# Altium PCB bldc.PcbDoc
Units mil, origin at the board's own origin, x right, y up, seen from the top; angles counter-clockwise.
Board outline 6000 x 4000 mil, 2 copper layers (Top Layer, Bottom Layer); 170 components, 106 nets, 483 pads, 0 vias.
Unrouted connection lines stored in the file: 348.
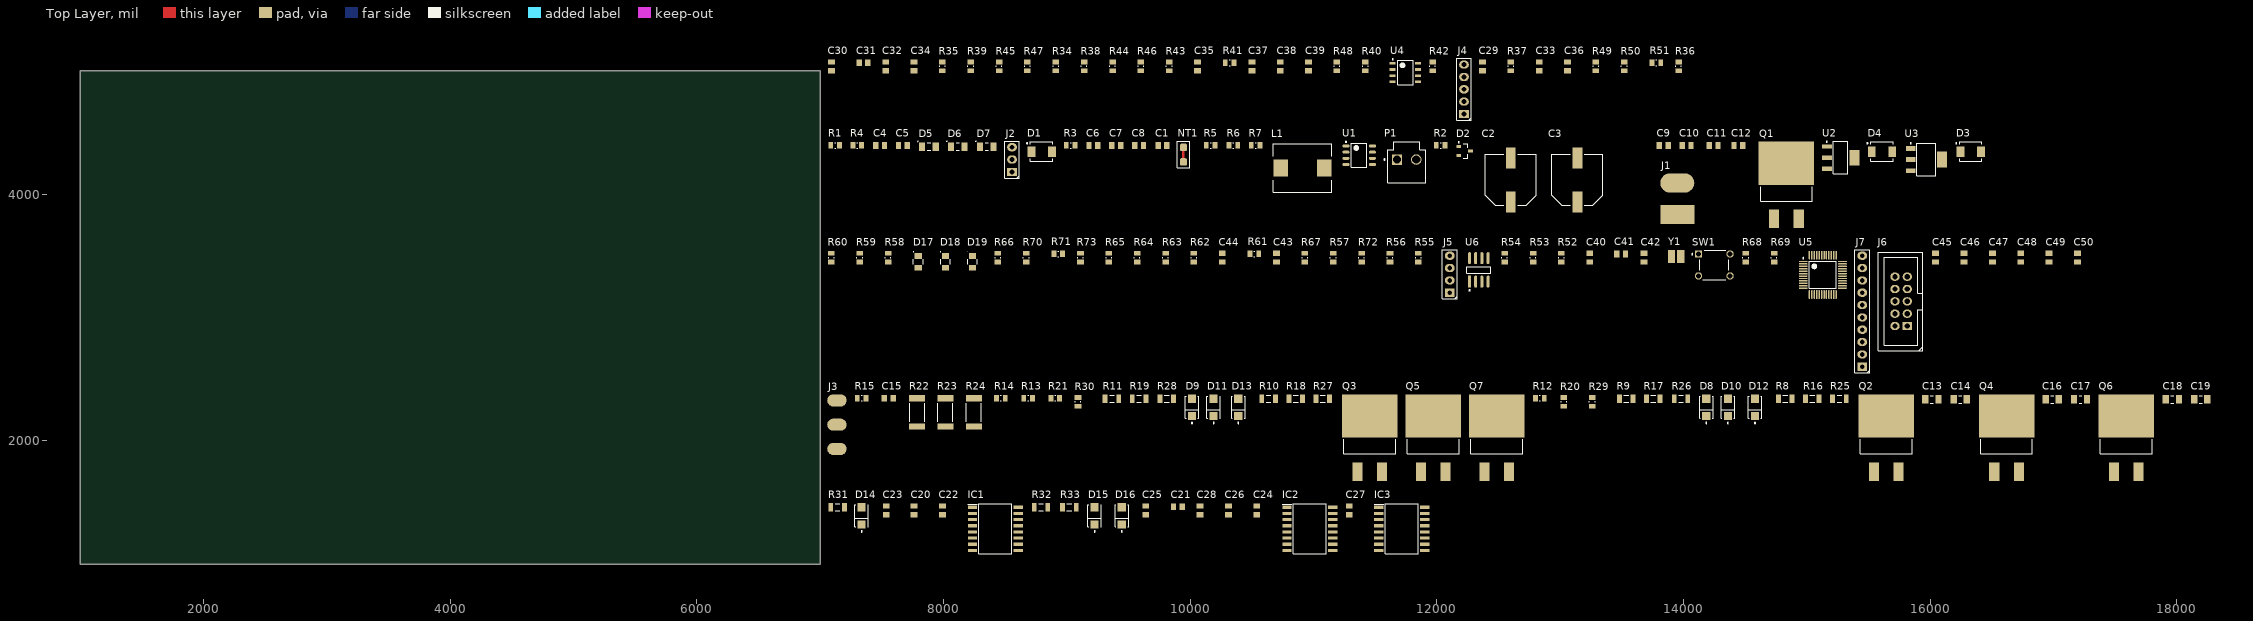
[diagram p0: Top Layer view]
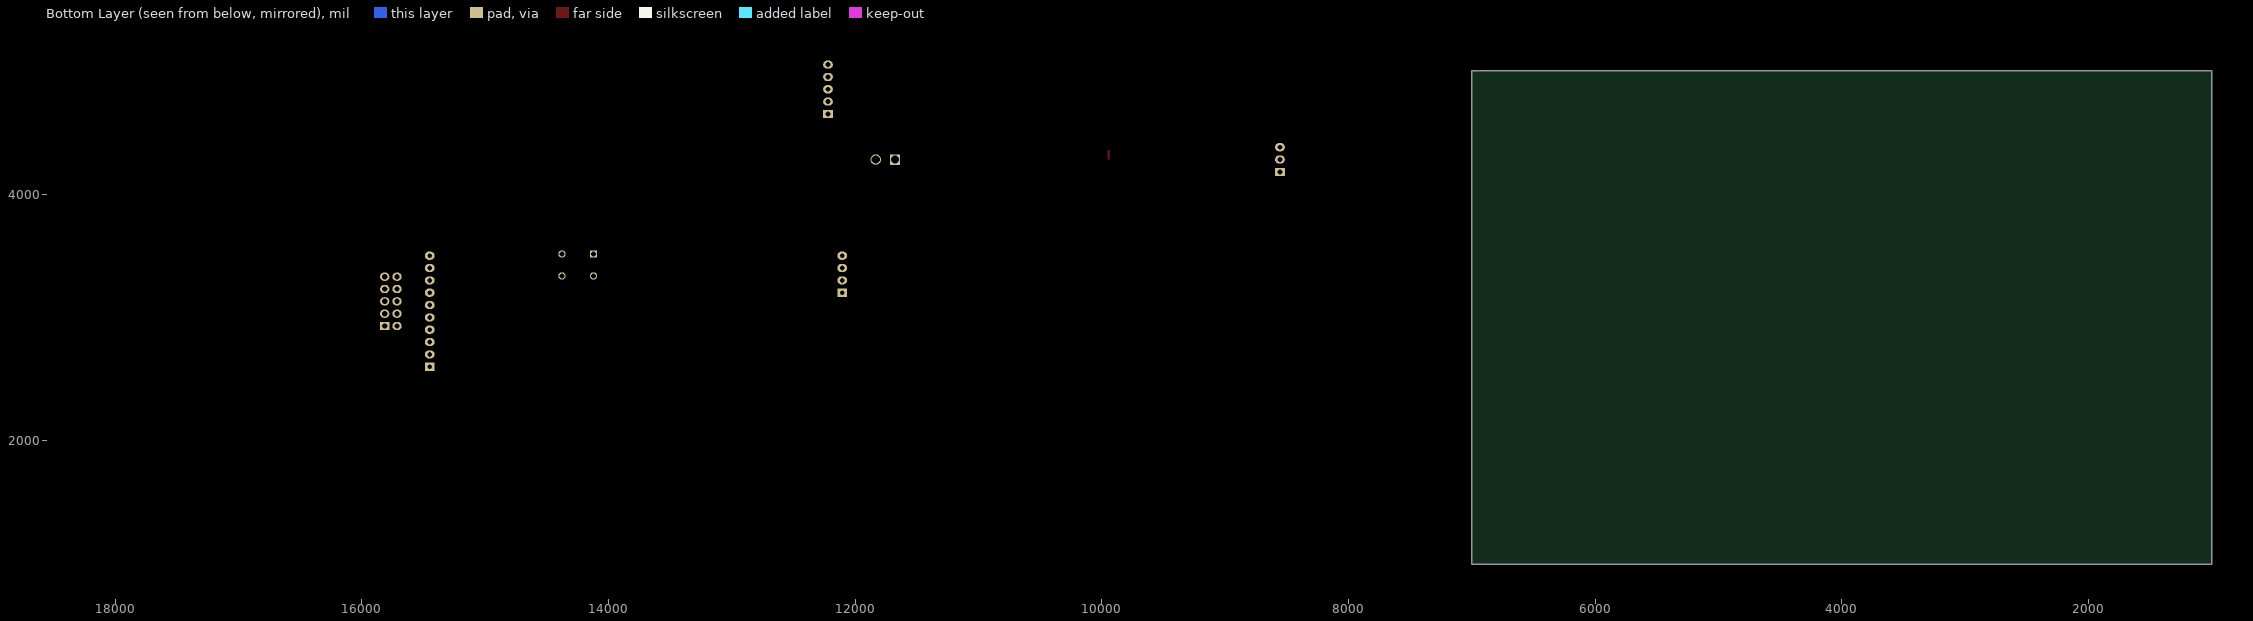
[diagram p1: Bottom Layer view, seen from below]

## Layer stack, top to bottom
Top Solder: solder mask 0.4, Solder Resist, Dk 3.5
Top Layer: signal copper 1.4
Dielectric 1: dielectric 12.6, FR-4, Dk 4.8
Bottom Layer: signal copper 1.4
Bottom Solder: solder mask 0.4, Solder Resist, Dk 3.5

## Board outline
1000,1000 7000,1000 7000,5000 1000,5000

## Design rules (kind name [scope] priority, off if disabled: settings)
Clearance [All] p1: gap=10 ignorepadtopadclearanceinfootprint=FALSE except(0: Arc-Hole Track-Hole SMDPad-Hole THPad-Hole Via-Hole Fill-Hole Poly-Hole Region-Hole Text-Hole)
PolygonConnect [All] p1: connectstyle=Relief reliefconductorwidth=10 reliefentries=4 polygonreliefangle="90 Angle" airgapwidth=10
RoutingVias [All] p1: holewidth=28 width=50 viastyle="Through Hole" minholewidth=28 minwidth=50 maxholewidth=28 maxwidth=50
SolderMaskExpansion [All] p1: expansion=4 istentingtop=FALSE
Width [All] p1: maxlimit=10 minlimit=10 preferedwidth=10
30 further rules are at their usual default settings.

## Components (designator, comment, footprint, x,y, rotation, side; value= is the part's Value field where it differs from the comment)
C1 "CAP" CAPC2012X06N 9775,4395 r0 top value=2.2u
C2 "Cap_Pos" B40940 12600,4115 r90 top value=120u
C3 "Cap_Pos" B40940 13140,4115 r90 top value=120u
C4 "CAP" CAPC2012X06N 7485,4395 r0 top value=22n
C5 "CAP" CAPC2012X06N 7670,4395 r0 top value=22p
C6 "CAP" CAPC2012X06N 9215,4395 r0 top value=4.7u
C7 "CAP" CAPC2012X06N 9400,4395 r0 top value=4.7u
C8 "CAP" CAPC2012X06N 9585,4395 r0 top value=4.7u
C9 "CAP" CAPC2012X06N 13840,4395 r0 top value=0.1u
C10 "CAP" CAPC2012X06N 14025,4395 r0 top value=10u
C11 "CAP" CAPC2012X06N 14245,4395 r0 top value=0.1u
C12 "CAP" CAPC2012X06N 14445,4395 r0 top value=10u
C13 "CAP" CAP_1206 16015,2335 r0 top value=0.1u
C14 "CAP" CAP_1206 16245,2335 r0 top value=1u
C15 "CAP" CAPC2012X06N 7555,2345 r0 top value=47n
C16 "CAP" CAP_1206 16990,2335 r0 top value=0.1u
C17 "CAP" CAP_1206 17220,2335 r0 top value=1u
C18 "CAP" CAP_1206 17965,2335 r0 top value=0.1u
C19 "CAP" CAP_1206 18195,2335 r0 top value=1u
C20 "CAP" CAPC2012X06N 7760,1435 r90 top value=0.1u
C21 "CAP" CAPC2012X06N 9900,1465 r0 top value=0.1u
C22 "CAP" CAPC2012X06N 7990,1435 r90 top value=1u
C23 "CAP" CAPC2012X06N 7535,1435 r90 top value=1u
C24 "CAP" CAPC2012X06N 10540,1435 r90 top value=1u
C25 "CAP" CAPC2012X06N 9640,1435 r90 top value=1u
C26 "CAP" CAPC2012X06N 10310,1435 r90 top value=0.1u
C27 "CAP" CAPC2012X06N 11290,1435 r90 top value=1u
C28 "CAP" CAPC2012X06N 10080,1435 r90 top value=1u
C29 "CAP" CAPC2012X06N 12370,5035 r90 top value=0.1n
C30 "CAP" CAPC2012X06N 7090,5035 r90 top value=150n
C31 "CAP" CAPC2012X06N 7350,5065 r0 top value=150n
C32 "CAP" CAPC2012X06N 7530,5035 r90 top value=150n
C33 "CAP" CAPC2012X06N 12830,5035 r90 top value=1u
C34 "CAP" CAPC2012X06N 7760,5035 r90 top value=150n
C35 "CAP" CAPC2012X06N 10060,5035 r90 top value=47n
C36 "CAP" CAPC2012X06N 13060,5035 r90 top value=0.1u
C37 "CAP" CAPC2012X06N 10500,5035 r90 top value=33n
C38 "CAP" CAPC2012X06N 10730,5035 r90 top value=33n
C39 "CAP" CAPC2012X06N 10960,5035 r90 top value=33n
C40 "CAP" CAPC2012X06N 13240,3485 r90 top value=6p
C41 "CAP" CAPC2012X06N 13495,3515 r0 top value=6p
C42 "CAP" CAPC2012X06N 13680,3485 r90 top value=0.1u
C43 "CAP" CAPC2012X06N 10700,3485 r90 top value=1u
C44 "CAP" CAPC2012X06N 10260,3485 r90 top value=0.1u
C45 "CAP" CAPC2012X06N 16045,3485 r90 top value=4.7u
C46 "CAP" CAPC2012X06N 16275,3485 r90 top value=0.1u
C47 "CAP" CAPC2012X06N 16505,3485 r90 top value=0.1u
C48 "CAP" CAPC2012X06N 16735,3485 r90 top value=0.1u
C49 "CAP" CAPC2012X06N 16965,3485 r90 top value=0.1u
C50 "CAP" CAPC2012X06N 17195,3485 r90 top value=0.1u
D1 "STPS2L40U" CAPM3216X18N 8795,4345 r0 top
D2 "BZX84-C12" SOT23 12225,4350 r0 top
D3 "STPS2L40U" CAPM3216X18N 16330,4345 r0 top
D4 "STPS2L40U" CAPM3216X18N 15610,4345 r0 top
D5 "GREEN" DIOC3216X06N 7880,4385 r0 top
D6 "GREEN" DIOC3216X06N 8115,4385 r0 top
D7 "GREEN" DIOC3216X06N 8350,4385 r0 top
D8 "ES1D-E3/61T" FP-95400-MFG 14185,2270 r90 top value="10 pF"
D9 "ES1D-E3/61T" FP-95400-MFG 10015,2270 r90 top value="10 pF"
D10 "ES1D-E3/61T" FP-95400-MFG 14360,2270 r90 top value="10 pF"
D11 "ES1D-E3/61T" FP-95400-MFG 10190,2270 r90 top value="10 pF"
D12 "ES1D-E3/61T" FP-95400-MFG 14580,2270 r90 top value="10 pF"
D13 "ES1D-E3/61T" FP-95400-MFG 10390,2270 r90 top value="10 pF"
D14 "ES1D-E3/61T" FP-95400-MFG 7335,1390 r90 top value="10 pF"
D15 "ES1D-E3/61T" FP-95400-MFG 9225,1390 r90 top value="10 pF"
D16 "ES1D-E3/61T" FP-95400-MFG 9445,1390 r90 top value="10 pF"
D17 "LED_GREEN" LED_3216 7795,3450 r90 top
D18 "LED_GREEN" LED_3216 8015,3450 r90 top
D19 "LED_GREEN" LED_3216 8235,3450 r90 top
IC1 "IR2110STRPBF" SOIC127P1032X265-16N 8420,1285 r0 top
IC2 "IR2110STRPBF" SOIC127P1032X265-16N 10970,1285 r0 top
IC3 "IR2110STRPBF" SOIC127P1032X265-16N 11715,1285 r0 top
J1 "Power" "Power Connector" 13950,3834.09 r90 top
J2 "Jp3" "HEADER 1x3 2.54mm" 8555,4280 r90 top
J3 "Power 3" "Power 3" 7135,2130 r90 top
J4 "Header 1x5 2.54mm" "Header 1x5 2.54mm" 12220,4650 r90 top
J5 "Header 1x4 2.54mm" "Header 1x4 2.54mm" 12105,3200 r90 top
J6 "IDC-10MS" IDC-10MS 15765,3130 r90 top
J7 "Header 2x4 2.54mm" "Header 1x10 2.54mm" 15450,2600 r90 top
L1 "HE1040" HE1040 10910,4210 r0 top value=100u
NT1 "NT" NT_20mil 9945,4320 r90 top net-tie
P1 "B2P-VH(LF)(SN)" JST-B2P-VH(LF)(SN)_V 11755,4225 r0 top
Q1 "IRF4905STRLPBF" FP-PG-TO263-3-MFG 14835,4075 r0 top
Q2 "IRF1010ZSTRLPBF" FP-PG-TO263-3-MFG 15645,2025 r0 top
Q3 "IRF1010ZSTRLPBF" FP-PG-TO263-3-MFG 11455,2025 r0 top
Q4 "IRF1010ZSTRLPBF" FP-PG-TO263-3-MFG 16620,2025 r0 top
Q5 "IRF1010ZSTRLPBF" FP-PG-TO263-3-MFG 11970,2025 r0 top
Q6 "IRF1010ZSTRLPBF" FP-PG-TO263-3-MFG 17590,2025 r0 top
Q7 "IRF1010ZSTRLPBF" FP-PG-TO263-3-MFG 12485,2025 r0 top
R1 "Resistor" RESC2012X06N 7120,4395 r0 top value=13k
R2 "Resistor" RESC2012X06N 12030,4395 r0 top value=3.5k
R3 "Resistor" RESC2012X06N 9030,4395 r0 top value=44.2k
R4 "Resistor" RESC2012X06N 7300,4395 r0 top value=5.11k
R5 "Resistor" RESC2012X06N 10165,4395 r0 top value=1k
R6 "Resistor" RESC2012X06N 10350,4395 r0 top value=330
R7 "Resistor" RESC2012X06N 10530,4395 r0 top value=330
R8 "1k" RESC3016X06N 14825,2340 r0 top value=20
R9 "1k" RESC3016X06N 13535,2340 r0 top value=0
R10 "1k" RESC3016X06N 10635,2340 r0 top value=20
R11 "1k" RESC3016X06N 9365,2340 r0 top value=0
R12 "10k" RESC2012X06N 12835,2345 r0 top
R13 "10k" RESC2012X06N 8685,2345 r0 top
R14 "Resistor" RESC2012X06N 8465,2345 r0 top value=1k
R15 "Resistor" RESC2012X06N 7335,2345 r0 top value=1k
R16 "1k" RESC3016X06N 15045,2340 r0 top value=20
R17 "1k" RESC3016X06N 13755,2340 r0 top value=0
R18 "1k" RESC3016X06N 10855,2340 r0 top value=20
R19 "1k" RESC3016X06N 9585,2340 r0 top value=0
R20 "10k" RESC2012X06N 13030,2315 r90 top
R21 "10k" RESC2012X06N 8905,2345 r0 top
R22 "Resistor" RESC2512 7785,2230 r90 top value=40m
R23 "Resistor" RESC2512 8015,2230 r90 top value=40m
R24 "Resistor" RESC2512 8245,2230 r90 top value=40m
R25 "1k" RESC3016X06N 15265,2340 r0 top value=20
R26 "1k" RESC3016X06N 13980,2340 r0 top value=0
R27 "1k" RESC3016X06N 11075,2340 r0 top value=20
R28 "1k" RESC3016X06N 9810,2340 r0 top value=0
R29 "10k" RESC2012X06N 13260,2315 r90 top
R30 "10k" RESC2012X06N 9090,2315 r90 top
R31 "Resistor" RESC3016X06N 7140,1460 r0 top value=0
R32 "Resistor" RESC3016X06N 8790,1460 r0 top value=0
R33 "Resistor" RESC3016X06N 9020,1460 r0 top value=0
R34 "Resistor" RESC2012X06N 8910,5035 r90 top value=12k
R35 "Resistor" RESC2012X06N 7990,5035 r90 top value=1.5k
R36 "Resistor" RESC2012X06N 13960,5035 r90 top value=47k
R37 "Resistor" RESC2012X06N 12600,5035 r90 top value=7.5k
R38 "Resistor" RESC2012X06N 9140,5035 r90 top value=12k
R39 "Resistor" RESC2012X06N 8220,5035 r90 top value=1.5k
R40 "Resistor" RESC2012X06N 11420,5035 r90 top value=9.1k
R41 "Resistor" RESC2012X06N 10320,5065 r0 top value=9.1k
R42 "Resistor" RESC2012X06N 11965,5035 r90 top value=68k
R43 "Resistor" RESC2012X06N 9830,5035 r90 top value=68k
R44 "Resistor" RESC2012X06N 9370,5035 r90 top value=12k
R45 "Resistor" RESC2012X06N 8450,5035 r90 top value=1.5k
R46 "Resistor" RESC2012X06N 9600,5035 r90 top value=12k
R47 "Resistor" RESC2012X06N 8680,5035 r90 top value=1.5k
R48 "Resistor" RESC2012X06N 11190,5035 r90 top value=1k
R49 "Resistor" RESC2012X06N 13290,5035 r90 top value=4.7k
R50 "Resistor" RESC2012X06N 13520,5035 r90 top value=4.7k
R51 "Resistor" RESC2012X06N 13780,5065 r0 top value=4.7k
R52 "Resistor" RESC2012X06N 13010,3485 r90 top value=0
R53 "Resistor" RESC2012X06N 12780,3485 r90 top value=0
R54 "Resistor" RESC2012X06N 12550,3485 r90 top value=0
R55 "Resistor" RESC2012X06N 11850,3485 r90 top value=0
R56 "Resistor" RESC2012X06N 11620,3485 r90 top value=0
R57 "Resistor" RESC2012X06N 11160,3485 r90 top value=0
R58 "Resistor" RESC2012X06N 7550,3485 r90 top value=0
R59 "Resistor" RESC2012X06N 7320,3485 r90 top value=0
R60 "Resistor" RESC2012X06N 7090,3485 r90 top value=0
R61 "Resistor" RESC2012X06N 10520,3515 r0 top value=0
R62 "Resistor" RESC2012X06N 10030,3485 r90 top value=0
R63 "Resistor" RESC2012X06N 9800,3485 r90 top value=0
R64 "Resistor" RESC2012X06N 9570,3485 r90 top value=0
R65 "Resistor" RESC2012X06N 9340,3485 r90 top value=0
R66 "Resistor" RESC2012X06N 8440,3485 r90 top value=0
R67 "Resistor" RESC2012X06N 10930,3485 r90 top value=10k
R68 "Resistor" RESC2012X06N 14505,3485 r90 top value=10k
R69 "Resistor" RESC2012X06N 14735,3485 r90 top value=10k
R70 "Resistor" RESC2012X06N 8670,3485 r90 top value=1k
R71 "Resistor" RESC2012X06N 8930,3515 r0 top value=1k
R72 "Resistor" RESC2012X06N 11390,3485 r90 top value=120
R73 "Resistor" RESC2012X06N 9110,3485 r90 top value=1k
SW1 "B3F-1000" OMRON-B3F-1000-4_V 14250,3425 r0 top
U1 "L5972D" SO-8 11370,4315 r0 top
U2 "LD1117S50TR" SOT-223_L 15275,4295 r0 top
U3 "LD1117S33TR" STM-SOT-223_M 15970,4280 r0 top
U4 "MC33078DR" D0008A_L 11745,4985 r0 top
U5 "STM32F303CBT6" STM-LQFP48_N 15130,3345 r0 top
U6 "SN65HVD230DR" FP-D0008A-IPC_A 12340,3385 r90 top
Y1 "NX3225GD-8MHZ-STD-CRA-3" NDK-NX3225GD-8MHZ-STD-CRA-3_V 13940,3495 r0 top

## Footprints (in the part's own frame and the unit in brackets; to place one, negate y for a bottom-side part, rotate by r counter-clockwise, add the part's x,y. Pads: shape width x height; smd on the part's side, far side on the other; paste and mask are expansions set on the pad)
B40940 [mm] "Aluminum Electrolytic Capacitor, Body 10,30x10,30x10,50mm, IPC Low Density"
  rect 4.3x2 smd: 1(-4.525,0) 2(4.525,0)
  silkscreen extent -5.25,-5.25 5.25,5.25, body extent -5.95,-5.25 5.95,5.25, height 10.5
CAP_1206 [mm]
  rect 1.3x1.75 smd: 1(-1.35,0) 2(1.35,0)
  silkscreen extent -0.3,-0.77 0.3,0.77, body extent -1.6,-0.85 1.6,0.85, height 1.5
CAPC2012X06N [mm] "Chip Capacitor, 2-Leads, Body 2,00x1,25mm, IPC Medium Density"
  rect 1.1x1.4 smd: 1(-0.9,0) 2(0.9,0)
  body extent -1.05,-0.67 1.05,0.67, height 0.6
CAPM3216X18N [mm]
  rect 1.62x2.15 smd: 1(-2.11,0) 2(2.11,0)
  silkscreen extent -3.12,-2 2.3,2, body extent -2.52,-1.97 2.52,1.97, height 2.45
D0008A_L [mm] "SOIC, 8-Leads, Body 5x4mm, Pitch 1.27mm, IPC High Density"
  rrect18% 1.25x0.55 smd: 1(-2.625,1.905) 2(-2.625,0.635) 3(-2.625,-0.635) 4(-2.625,-1.905) 5(2.625,-1.905) 6(2.625,-0.635) 7(2.625,0.635) 8(2.625,1.905)
  silkscreen extent -2.75,-2.5 1.6,2.85, body extent -3,-2.45 3,2.45, height 1.63
DIOC3216X06N [mm] "Chip Diode, 2-Leads, Body 3,15x1,60mm, IPC Medium Density"
  rect 1.3x1.75 smd: 1(-1.4,0) 2(1.4,0)
  silkscreen extent -2.31,-0.77 0.35,1.14, body extent -1.65,-0.85 1.65,0.85, height 0.6
FP-95400-MFG [mm]
  rect 1.7x1.68 smd paste+0 mask+0: 1(-1.79,0) 2(1.79,0)
  silkscreen extent -3.32,-1.4 2.25,1.4, body extent -2.74,-1.5 2.74,1.5, height 0.25
FP-D0008A-IPC_A [mil]
  rect 97.21x24.49 smd paste+0 mask+0: 1(-95.02,75)
  rrect100% 97.21x24.49 smd paste+0 mask+0: 2(-95.02,25) 3(-95.02,-25) 4(-95.02,-75) 5(95.02,-75) 6(95.02,-25) 7(95.02,25) 8(95.02,75)
  silkscreen extent -170,-97 27,97, body extent -163,-116 163,116, height 10
FP-PG-TO263-3-MFG [mm]
  rect 11.43x8.89 smd paste+0 mask+0: D(0,4.445)
  rect 2.08x3.81 smd paste+0 mask+0: G(-2.54,-6.985) S(2.54,-6.985)
  silkscreen extent -5.34,-3.36 5.34,-0.38, body extent -5.81,-8.99 5.81,8.99, height 0.25
HE1040 [mm]
  rect 3x3.5 smd: 1(-4.5,0) 2(4.5,0)
  silkscreen extent -6,-5 6,5
"HEADER 1x3 2.54mm" [mm]
  rect 1.7x2 hole 1: 1(-2.54,0)
  oval 1.7x2 hole 1: 2(0,0) 3(2.54,0)
  silkscreen extent -3.81,-1.52 3.81,1.52, body extent -3.81,-1.27 3.81,1.27, height 8.54
"Header 1x4 2.54mm" [mm]
  rect 1.7x2 hole 1: 1(0,0)
  oval 1.7x2 hole 1: 2(2.54,0) 3(5.08,0) 4(7.62,0)
  silkscreen extent -1.27,-1.52 8.89,1.52, body extent -1.27,-1.27 8.89,1.27, height 8.54
"Header 1x5 2.54mm" [mm]
  rect 1.7x2 hole 1: 1(0,0)
  oval 1.7x2 hole 1: 2(2.54,0) 3(5.08,0) 4(7.62,0) 5(10.16,0)
  silkscreen extent -1.27,-1.52 11.43,1.52, body extent -1.27,-1.27 11.43,1.27, height 8.54
"Header 1x10 2.54mm" [mm]
  rect 1.7x2 hole 1: 1(0,0)
  oval 1.7x2 hole 1: 2(2.54,0) 3(5.08,0) 4(7.62,0) 5(10.16,0) 6(12.7,0) 7(15.24,0) 8(17.78,0) 9(20.32,0) 10(22.86,0)
  silkscreen extent -1.27,-1.52 24.13,1.52, body extent -1.27,-1.27 24.13,1.27, height 8.54
IDC-10MS [mm] "2x5 2.54mm"
  rect 1.7x1.9 hole 1.1: 1(-5.08,-1.27)
  oval 1.7x1.9 hole 1.1: 2(-5.08,1.27) 3(-2.54,-1.27) 4(-2.54,1.27) 5(0,-1.27) 6(0,1.27) 7(2.54,-1.27) 8(2.54,1.27) 9(5.08,-1.27) 10(5.08,1.27)
  silkscreen extent -10.15,-4.42 10.15,4.7, body extent -10.18,-4.43 10.18,4.67, height 9.1
JST-B2P-VH(LF)(SN)_V [mm] "THD, 2-Leads, Body 8.5x7.86mm, Pitch 3.96mm"
  rect 2.15x2.15 hole 1.65: 1(-1.98,1.4)
  round 2.15 hole 1.65: 2(1.98,1.4)
  silkscreen extent -4.7,-3.4 3.93,5.1, body extent -3.93,-3.2 3.93,5.3, height 10.9
LED_3216 [mm]
  rect 1.2x1.5 smd: A(-1.2,0) K(1.2,0)
  silkscreen extent -0.5,-1 2.1,1.02, body extent -1.6,-0.8 1.6,0.8, height 1.1
NDK-NX3225GD-8MHZ-STD-CRA-3_V [mm] "SMD, 2-Leads, Body 3.2x2.5mm"
  rect 1.5x2.7 smd: 1(-0.95,0) 2(0.95,0)
  body extent -1.6,-1.25 1.6,1.25, height 1
NT_20mil [mil] "20mil Uninsulated Shorting Plug"
  rrect50% 60x60 smd: 1(-59.06,0) 2(59.06,0)
  Top Layer region: -39.37,-10 39.37,-10 39.37,10 -39.37,10
  silkscreen extent -108,-49 108,49
OMRON-B3F-1000-4_V [mm] "TH, 4-Leads, Body 6x6mm"
  rect 1.5x1.5 hole 1 paste+0: 1(-3.25,2.25)
  round 1.5 hole 1 paste+0: 2(3.25,2.25) 4(3.25,-2.25)
  round 1.5 hole 1 paste+0 mask+0.102: 3(-3.25,-2.25)
  silkscreen extent -4.67,-3 3,3, body extent -3.4,-3 3.4,3, height 4.5
"Power 3" [mm]
  oval 2.5x4 smd: 1(-5,0) 2(0,0) 3(5,0)
"Power Connector" [mm]
  rect 4x7 smd: 1(0,0)
  oval 4x7 smd: 2(6.5,0)
RESC2012X06N [mm] "Chip Resistor, 2-Leads, Body 2,00x1,25mm, IPC Medium Density"
  rect 1x1.35 smd: 1(-0.9,0) 2(0.9,0)
  silkscreen extent -0.1,-0.58 0.1,0.58, body extent -1.05,-0.67 1.05,0.67, height 0.6
RESC2512 [mm] "Chip Resistor, 2-Leads, Body 6,35x3,20mm, IPC Medium Density"
  rect 1.3x3.3 smd: 1(-2.925,0) 2(2.925,0)
  silkscreen extent -1.9,-1.55 1.9,1.55, body extent -3.22,-1.65 3.22,1.65, height 0.6
RESC3016X06N [mm] "Chip Resistor, 2-Leads, Body 3,05x1,60mm, IPC Medium Density"
  rect 1x1.7 smd: 1(-1.4,0) 2(1.4,0)
  silkscreen extent -0.5,-0.75 0.5,0.75, body extent -1.55,-0.85 1.55,0.85, height 0.6
SO-8 [mm] "SO-8, 8-Leads, Body 4,90x3,90mm, Pitch 1,27mm, IPC Medium Density"
  oval 1.45x0.6 smd: 1(-2.725,1.905) 2(-2.725,0.635) 3(-2.725,-0.635) 4(-2.725,-1.905) 5(2.725,-1.905) 6(2.725,-0.635) 7(2.725,0.635) 8(2.725,1.905)
  silkscreen extent -2.85,-2.5 1.6,2.88, body extent -3,-2.5 3,2.5, height 1.75
SOIC127P1032X265-16N [mm]
  rect 1.925x0.65 smd: 1(-4.712,4.445) 2(-4.712,3.175) 3(-4.712,1.905) 4(-4.712,0.635) 5(-4.712,-0.635) 6(-4.712,-1.905) 7(-4.712,-3.175) 8(-4.712,-4.445) 9(4.712,-4.445) 10(4.712,-3.175) 11(4.712,-1.905) 12(4.712,-0.635) 13(4.712,0.635) 14(4.712,1.905) 15(4.712,3.175) 16(4.712,4.445)
  silkscreen extent -5.68,-5.15 3.4,5.15, body extent -5.16,-5.15 5.16,5.15, height 2.65
SOT23 [mm] "SOT23, 3-Leads, Body 2,90x2,45mm, Pitch 0,95mm, IPC Medium Density"
  rect 1x0.6 smd: 1(-1.2,0.95) 2(-1.2,-0.95) 3(1.2,0)
  silkscreen extent -1.32,-1.5 0.7,1.92, body extent -1.3,-1.5 1.3,1.5, height 1.1
SOT-223_L [mm] "SOT223, 4-Leads, Body 6.5x3.5mm, Pitch 2.3mm, Lead Span 7mm, IPC High Density"
  rect 2.1x0.9 smd: 1(-2.85,2.3) 2(-2.85,0) 3(-2.85,-2.3)
  rect 2.1x3.2 smd: 4(2.85,0)
  silkscreen extent -2.97,-3.35 1.5,3.42, body extent -1.85,-3.35 1.85,3.35, height 1.8
STM-LQFP48_N [mm] "QFP, 48-Leads, Body 7x7mm, Pitch 0.5mm, IPC Medium Density"
  oval 1.8x0.3 smd: 1(-4.05,2.75) 2(-4.05,2.25) 3(-4.05,1.75) 4(-4.05,1.25) 5(-4.05,0.75) 6(-4.05,0.25) 7(-4.05,-0.25) 8(-4.05,-0.75) 9(-4.05,-1.25) 10(-4.05,-1.75) 11(-4.05,-2.25) 12(-4.05,-2.75) 25(4.05,-2.75) 26(4.05,-2.25) 27(4.05,-1.75) 28(4.05,-1.25) 29(4.05,-0.75) 30(4.05,-0.25) 31(4.05,0.25) 32(4.05,0.75) 33(4.05,1.25) 34(4.05,1.75) 35(4.05,2.25) 36(4.05,2.75)
  oval 0.3x1.8 smd: 13(-2.75,-4.05) 14(-2.25,-4.05) 15(-1.75,-4.05) 16(-1.25,-4.05) 17(-0.75,-4.05) 18(-0.25,-4.05) 19(0.25,-4.05) 20(0.75,-4.05) 21(1.25,-4.05) 22(1.75,-4.05) 23(2.25,-4.05) 24(2.75,-4.05) 37(2.75,4.05) 38(2.25,4.05) 39(1.75,4.05) 40(1.25,4.05) 41(0.75,4.05) 42(0.25,4.05) 43(-0.25,4.05) 44(-0.75,4.05) 45(-1.25,4.05) 46(-1.75,4.05) 47(-2.25,4.05) 48(-2.75,4.05)
  silkscreen extent -4.17,-2.75 2.75,3.57, body extent -3.5,-3.5 3.5,3.5, height 1.6
STM-SOT-223_M [mm] "SOT223, 4-Leads, Body 6.7x3.7mm, Pitch 2.3mm, IPC Low Density"
  rect 2x1 smd: 1(-3.225,2.3) 2(-3.225,0) 3(-3.225,-2.3)
  rect 2x3.3 smd: 4(3.225,0)
  silkscreen extent -3.35,-3.35 1.95,3.47, body extent -3.5,-3.35 3.5,3.35, height 1.8

## Part data
D1 D3 D4: library part DIOD
D5 D6 D7: library part LED_G
D8 D9 D10 D11 D12 D13 D14 D15 D16: library part CMP-02540-000037-1, "DIODE GEN PURP 200V 1A DO214AC", Capacitance="10 pF", Forward Current=1A, Manufacturer=Vishay, Max Junction Temp=+150°C, Max Repetitive Reverse Voltage=200V, Max Surge Forward Current=30A, Package=95400, Peak Reverse Current=5uA, Temperature="-55°C to +150°C", Temperature Range Low=-55°C, Automotive=No, Category=Diode, ComponentLink2Description=Datasheet, ComponentLink2URL=http://www.vishay.com/docs/88586/es1.pdf, Device Class L1="Discrete Semiconductors", Device Class L2=Diodes, Device Class L3="Rectifier Diodes", Digikey Description="DIODE GEN PURP 200V 1A DO214AC", Footprint Url=http://www.vishay.com/docs/95400/sma.pdf, Height=2.29mm, Lead Free=Yes, Manufacturer Part Number=ES1D-E3/61T, Mouser Description="Ultrafast Rectifier, Plastic Surface Mount, 1 A, 200 VDC, DO0214AC (SMA), RoHS", Octopart=https://octopart.com/es1d-e3%2F61t-vishay-39550266, RoHS=TRUE, Standoff Height=0mm, Temperature Range High=+150°C
IC1 IC2 IC3: "Integrated Circuit", Manufacturer_Name=Infineon, Mouser Part Number=942-IR2110STRPBF, Arrow Part Number=IR2110STRPBF, Arrow Price/Stock=https://www.arrow.com/en/products/ir2110strpbf/infineon-technologies-ag?region=nac, Datasheet Link=https://www.infineon.com/cms/en/product/power/gate-driver-ics/?, Height=2.65mm, Manufacturer_Part_Number=IR2110STRPBF, Mouser Price/Stock=https://www.mouser.co.uk/ProductDetail/Infineon-Technologies/IR2110STRPBF?qs=2r01AXMCG3P4pNuJUqFzxg%3D%3D
J2: library part Jumper3
J4: library part "Header 1x5"
J5: library part "Header 1x4"
J6: "Вилка на плату прямая 2x5 2.54мм"
J7: library part "Header 2x4"
L1: library part L
P1: library part CMP-002-00025-2, "Male Header, Pitch 3.96 mm, 1 x 2 Position, Height 10.9 mm, Tail Length 3.7 mm, -25 to 85 degC, RoHS, Bulk", Manufacturer=JST, Max Operating Temperature=85°C, Min Operating Temperature=-25°C, Package Description="Male Header, Pitch 3.96 mm, 1 x 2 Position, Height 10.9 mm, Tail Length 3.7 mm", Case/Package=B2P-VH(LF)(SN), Connector Type=Header, Datasheet URL=http://www.jst-mfg.com/product/pdf/eng/eVH.pdf, Datasheet Version=May-16, Gender=Male, Manufacturer URL=http://www.jst.com/home2.html, Mounting Technology=TH, Package Reference=B2P-VH(LF)(SN), RoHS Compliant=Unknown
Q1: library part PMOS, "N-channel mosfet transistor"
Q2 Q3 Q4 Q5 Q6 Q7: library part NMOS, "N-channel mosfet transistor", Source=https://www.chipdip.ru/product/irf1010zstrlpbf-infineon
R8 R9 R10 R11 R12 R13 R16 R17 R18 R19 R20 R21 R25 R26 R27 R28 R29 R30: library part Resistor
SW1: library part CMP-011-00004-2, "Tactile Switch, SPST-NO, 0.05 A, 24 V, -25 to 70 degC, 4-Pin THD, RoHS, Bulk", Contact Current Rating=50mA, Manufacturer="Omron Electronic Components", Max Contact Resistance=100mohm, Max Operating Temperature=70°C, Max Voltage Rating (DC)=24V, Min Operating Temperature=-25°C, Operating Force=100gf, Package Description="4-Pin Through Hole Device, Body 6 x 6 mm", Package Quantity=1500, Resistance=0.1Ohm, Case/Package=B3F-1000, Contact Material=Gold, Contact Plating=Gold, Current Rating=50mA, Datasheet URL=http://www.omron.com/ecb/products/pdf/en-b3f.pdf, Datasheet Version=Jan-15, Manufacturer URL=http://www.omron.com/, Max Current Rating=50mA, Mounting Technology=TH, Package Reference=B3F-1000, Packaging=Bulk, Pins=4, RoHS Compliant=True, Throw Configuration=SPST, Voltage Rating=24V, Voltage Rating (DC)=24V
U1: "Buck Switching Regulator IC Positive Adjustable 1.235V 1 Output 2A 8-SOIC (0.154\", 3.90mm Width)"
U2: library part CMP-0244-00312-1, "Fixed Low Drop Positive Voltage Regulator, 5V, 4-Pin SOT-223, Tape and Reel", ComponentLink1Description="Manufacturer URL", ComponentLink1URL=http://www.st.com, ComponentLink2Description=Datasheet, ComponentLink2URL=http://www.st.com/internet/com/TECHNICAL_RESOURCES/TECHNICAL_LITERATURE/DATASHEET/CD00000544.pdf, DatasheetVersion=1/11/2011, PackageDescription="4-Pin SOT-223 Package, 6.5 x 3.5 mm Body, 2.3 mm Pitch, 7 mm Lead Span", PackageReference=SOT-223, PackageVersion=2010
U3: library part CMP-019-00019-3, "Low Drop Positive Voltage Regulator, 800 mA, Fixed 3.3 V Output, 0 to 125 degC, 3-Pin TO-220, RoHS, Tape and Reel", Case/Package=TO-261-4, Dropout Voltage=1.1V, Manufacturer=STMicroelectronics, Max Input Voltage=15V, Max Operating Temperature=125°C, Max Ouput Current=1.3A, Min Input Voltage=4.75V, Min Operating Temperature=0°C, Nominal Output Voltage=3.3V, Output Current=950mA, Package Description="4-Pin Small Outline Transistor, Body 6.5 x 3.5 mm, Pitch 2.3 mm", Package Quantity=2500, Package Reference=SOT-223, Power=12W, Datasheet URL=http://www.farnell.com/datasheets/1776449.pdf, Datasheet Version="Rev. 33, 11/2013", Manufacturer URL=http://www.st.com/, Max Supply Voltage=15V, Min Supply Voltage=4.75V, Mounting Technology=SM, Output Voltage=3.3V, Outputs=1, Packaging=TapeandReel, Pins=3, RoHS Compliant=True
U4: library part CMP-0017-00420-2, "Dual High-Speed Low-Noise Operational Amplifier, 10 to 36 V, -40 to 85 degC, 8-pin SOIC (D8), Green (RoHS & no Sb/Br)", Manufacturer="Texas Instruments", Rating=Catalog, Total Supply Voltage(Max)(+5V is 5, +/-5V is 10)=36, Total Supply Voltage(Min)(+5V is 5, +/-5V is 10)=10, CMRR(Min)(dB)=80, Code_JEDEC=MS-012, ComponentLink1Description="Manufacturer URL", ComponentLink1URL=http://www.ti.com/, ComponentLink2Description=Datasheet, ComponentLink2URL=http://www.ti.com/lit/ds/symlink/mc33078.pdf, ComponentLink3Description="Package Specification", ComponentLink3URL=http://www.ti.com/litv/pdf/msoi002j, DatasheetVersion=SLLS633C, Eco-Plan="Green (RoHS & no Sb/Br)", GBW(Typ)(MHz)=16, IIB(Max)(pA)=750000, Iq per channel(Max)(mA)=2.5, Mounting Technology="Surface Mount", Number of Channels=2, Offset Drift(Typ)(uV/C)=2, PackageDescription="8-Pin Plastic Small Outline, Body 4.9 x 3.9 mm, Pitch 1.27 mm", PackageReference=D0008A, PackageVersion="4040047-3/M, 06/2011", PartNumber=MC33078DR, Slew Rate(Typ)(V/us)=7, Sub Family="General Purpose Amplifier, High Supply Voltage Amplifier (>=30V), Low Noise Amp (<=10nV/rtHz)", Vio (25C)(Max)(mV)=2, Vn at 1kHz(Typ)(nV/rtHz)=4.5
U5: library part CMP-0572-00014-2, "ARM Cortex-M4 32-bit MCU, 128 KB Flash, 32 KB Internal RAM, 37 I/Os, 48-pin LQFP, -40 to 85 degC, Tray", I/Os (High Current)=37, Operating Frequency(F) (Processor speed) (MHz)=72, Supply Voltage(Vcc) min (V)=2, ComponentLink1Description="Manufacturer URL", ComponentLink1URL=http://www.st.com/web/en/home.html, ComponentLink2Description=Datasheet, ComponentLink2URL=http://www.st.com/st-web-ui/static/active/en/resource/technical/document/datasheet/DM00058181.pdf, ComponentLink3Description="Package Specification", ComponentLink3URL=http://www.st.com/st-web-ui/static/active/en/resource/technical/document/datasheet/DM00058181.pdf, Core="ARM Cortex-M4", D/A Converter="2x12-bit (2 Channel)", DatasheetVersion="Rev. 6", FLASH Size (Prog) (kB)=128, Internal RAM Size (kB)=32, Mounting Technology="Surface Mount", PackageDescription="48-Pin Low Profile Quad Flat Package, 7 x 7 mm Body, 0.5 mm Pitch", PackageReference=LQFP48, PackageVersion="Rev. 6, 06/2013", Packing=Tray, PartNumber=STM32F303CBT6
U6: library part CMP-0315-00015-3, "IC TRANSCEIVER HALF 1/1 8SOIC", Case/Package=D, Max Operating Temperature=85°C, Max Supply Current=17mA, Max Supply Voltage=3.6V, Min Operating Temperature=-40°C, Min Supply Voltage=3V, Operating Supply Voltage=3.3V, Package Quantity=1, Contact Plating=Gold, Data Rate=1Mbps, Lead Free="Lead Free", Nominal Supply Current=17mA, Number of Drivers=1, Number of I/Os=2, Number of Pins=8, Number of Receive Buffers=1, Number of Receivers=1, Number of Transceivers=1, Number of Transmit Buffers=1, Packaging="Tape and Reel", Radiation Hardening=No, REACH SVHC="No SVHC", Termination=SMD/SMT, Weight=0.002561oz
Y1: library part CMP-2000-07595-1, "Crystal Unit, 8 MHz, 8 pF, -40 to 150 degC, 2-Pin SMD, RoHS, Tape and Reel", Case/Package=SMD/SMT, ESR (Equivalent Series Resistance)=500Ohm, Frequency=8MHz, Frequency Stability=150ppm, Frequency Tolerance=50ppm, Load Capacitance=8pF, Manufacturer=NDK, Max Operating Temperature=150degC, Min Operating Temperature=-40degC, Package Description="2-Pin Surface Mount Device, Body 3.2 x 2.5 mm", Package Quantity=3000, Datasheet URL=http://www.ndk.com/images/products/catalog/c_NX3225GD-STD-CRA-3_e.pdf, Datasheet Version=11/2016, Height=0.039inch, Length=0.126inch, Manufacturer URL=http://www.ndk.com/en/, Mount=SurfaceMount, Mounting Technology=SurfaceMount, Number of Pins=2, Package Reference=NX3225GD-8MHZ-STD-CRA-3, Packaging=TapeandReel, RoHSCompliant=True, Width=0.098inch

## Nets (pads, with @x,y where several pads share a name; then routed paths per layer and width w, separated by ;. In a path a pad name is that pad's centre, name@x,y a point inside that pad or via, vN(x,y) a via of type N, cw(c..) or ccw(c..) an arc to the next point about the centre after c; other vN are vias at no path point)
+3.3: C12.1 C20.1 C21.1 C26.1 C43.2 C44.2 C45.1 C46.1 C47.1 C48.1 C49.1 C50.1 IC1.11 IC2.11 IC3.11 J4.1 J5.1 J7.1 R6.2 R49.2 R50.2 R51.2 R69.2 U3.2 U3.4 U5.1 U5.9 U5.24 U5.36 U5.48 U6.3
+5: C10.1 D3.2 R7.2 U2.2 U2.4
+12: C9.1 C23.2 C25.2 C28.2 C33.1 C36.1 IC1.3 IC2.3 IC3.3 J2.2 R5.2 R31.1 R32.1 R33.1 R36.2 U2.3 U4.8
+E5: D4.2 J6.9 J6.10
+E12: J2.1 P1.1
adc_dc: R66.1 U5.12
adc_i: R65.1 U5.11
CAN_RX: U5.32 U6.4
CAN_TX: U5.33 U6.1
CANH: J5.2 R72.2 U6.7
CANL: J5.3 R72.1 U6.6
com: C23.1 C25.1 C28.1 IC1.2 IC2.2 IC3.2 Q3.S Q5.S Q7.S R13.1 R14.1 R21.1 R22.2 R23.2 R24.2 R30.1
comp_u: R61.1 U5.18
comp_v: R62.1 U5.17
comp_w: R63.1 U5.22
DAC1: R71.2 U5.14
DAC2: R70.2 U5.15
FB: R3.1 R4.2 U1.5
GND: C1.2 C2.2 C3.2 C5.2 C6.2 C7.2 C8.2 C9.2 C10.2 C11.2 C12.2 C13.2 C14.2 C16.2 C17.2 C18.2 C19.2 C20.2 C21.2 C26.2 C29.2 C30.2 C31.2 C32.2 C33.2 C34.2 C35.2 C36.2 C37.2 C38.2 C39.2 C40.2 C41.2 C42.2 C43.1 C44.1 C45.2 C46.2 C47.2 C48.2 C49.2 C50.2 D1.2 D5.1 D6.1 D7.1 D17.K D18.K D19.K IC1.15 IC2.15 IC3.15 J1.2 J4.5 J5.4 J6.5 J6.6 J7.8 NT1.1 NT1.2 P1.2 R1.1 R2.1 R4.1 R15.1 R22.1 R23.1 R24.1 R35.1 R37.1 R39.1 R45.1 R47.1 R67.1 R68.2 SW1.3 SW1.4 U1.2 U1.3 U1.6 U1.7 U2.1 U3.1 U4.4 U5.8 U5.23 U5.35 U5.47 U6.2
hall_u: R58.1 U5.42
hall_v: R59.1 U5.43
hall_w: R60.1 U5.45
LED: R73.2 U5.19
NetC2_1: C2.1 C3.1 J1.1 Q1.D
NetC4_1: C4.1 C5.1 U1.4
NetC4_2: C4.2 R1.2
NetC6_1: C6.1 C7.1 C8.1 J2.3 L1.2 R3.2
NetC11_1: C11.1 D3.1 D4.1 U3.3
NetC15_1: C15.1 R14.2 R40.1
NetC15_2: C15.2 R15.2 R41.1
NetC22_1: C22.1 D14.1 IC1.7
NetC22_2: C22.2 IC1.6 J3.3 Q6.S Q7.D R29.1 R44.2
NetC24_1: C24.1 D15.1 IC2.7
NetC27_1: C27.1 D16.1 IC3.7
NetC29_1: C29.1 R36.1 R37.2 U4.5
NetC30_1: C30.1 R34.1 R35.2 R61.2
NetC31_1: C31.1 R38.1 R39.2 R62.2
NetC32_1: C32.1 R44.1 R45.2 R63.2
NetC34_1: C34.1 R46.1 R47.2 R66.2
NetC35_1: C35.1 R48.2 R64.2 R65.2
NetC37_1: C37.1 J4.2 R49.1 R58.2
NetC38_1: C38.1 J4.3 R50.1 R59.2
NetC39_1: C39.1 J4.4 R51.1 R60.2
NetC40_1: C40.1 U5.5 Y1.1
NetC41_1: C41.1 U5.6 Y1.2
NetD1_1: D1.1 L1.1 U1.1
NetD2_1: D2.1 Q1.G R2.2
NetD5_2: D5.2 R5.1
NetD6_2: D6.2 R6.1
NetD7_2: D7.2 R7.1
NetD8_1: D8.1 IC2.8 R8.1
NetD8_2: D8.2 R9.1
NetD9_1: D9.1 IC2.1 R10.1
NetD9_2: D9.2 R11.1
NetD10_1: D10.1 IC3.8 R16.1
NetD10_2: D10.2 R17.1
NetD11_1: D11.1 IC3.1 R18.1
NetD11_2: D11.2 R19.1
NetD12_1: D12.1 IC1.8 R25.1
NetD12_2: D12.2 R26.1
NetD13_1: D13.1 IC1.1 R27.1
NetD13_2: D13.2 R28.1
NetD14_2: D14.2 R31.2
NetD15_2: D15.2 R32.2
NetD16_2: D16.2 R33.2
NetD17_A: D17.A R70.1
NetD18_A: D18.A R71.1
NetD19_A: D19.A R73.1
NetIC1_12: IC1.12 R54.2
NetIC1_14: IC1.14 R57.2
NetIC2_12: IC2.12 R52.2
NetIC2_14: IC2.14 R55.2
NetIC3_12: IC3.12 R53.2
NetIC3_14: IC3.14 R56.2
NetQ2_G: Q2.G R8.2 R9.2 R12.2
NetQ3_G: Q3.G R10.2 R11.2 R13.2
NetQ4_G: Q4.G R16.2 R17.2 R20.2
NetQ5_G: Q5.G R18.2 R19.2 R21.2
NetQ6_G: Q6.G R25.2 R26.2 R29.2
NetQ7_G: Q7.G R27.2 R28.2 R30.2
NetR40_2: R40.2 R42.1 U4.3
NetR41_2: R41.2 R43.2 U4.2
NetR42_2: R42.2 U4.6 U4.7
NetR43_1: R43.1 R48.1 U4.1
NetR67_2: R67.2 U6.8
NetR68_1: R68.1 U5.44
over_current: R64.1 U5.10
PA15: J7.2 U5.38
PB3: J7.3 U5.39
PB4: J7.4 U5.40
PB5: J7.5 U5.41
PB9: J7.6 U5.46
PC13: J7.7 U5.2
PWM_h1: R52.1 U5.29
PWM_h2: R53.1 U5.30
PWM_h3: R54.1 U5.31
PWM_l1: R55.1 U5.26
PWM_l2: R56.1 U5.27
PWM_l3: R57.1 U5.28
R_BUTTON: C42.1 SW1.1 SW1.2 U5.7
sd: IC1.13 IC2.13 IC3.13 R69.1 U5.21
SWCLK: J6.2 U5.37
SWDIO: J6.4 U5.34
U: C24.2 IC2.6 J3.1 Q2.S Q3.D R12.1 R34.2
V: C27.2 IC3.6 J3.2 Q4.S Q5.D R20.1 R38.2
VM: C1.1 C13.1 C14.1 C16.1 C17.1 C18.1 C19.1 D2.3 Q1.S Q2.D Q4.D Q6.D R46.2 U1.8
pads on no net: D2.2 IC1.4 IC1.5 IC1.9 IC1.10 IC1.16 IC2.4 IC2.5 IC2.9 IC2.10 IC2.16 IC3.4 IC3.5 IC3.9 IC3.10 IC3.16 J6.1 J6.3 J6.7 J6.8 J7.9 J7.10 U5.3 U5.4 U5.13 U5.16 U5.20 U5.25 U6.5